# Altium PCB quadcopter_pcb.PcbDoc
Units mil, origin at the board's own origin, x right, y up, seen from the top; angles counter-clockwise.
Board outline 5909.63 x 5909.63 mil, 2 copper layers (Top Layer, Bottom Layer); 68 components, 47 nets, 252 pads, 72 vias.
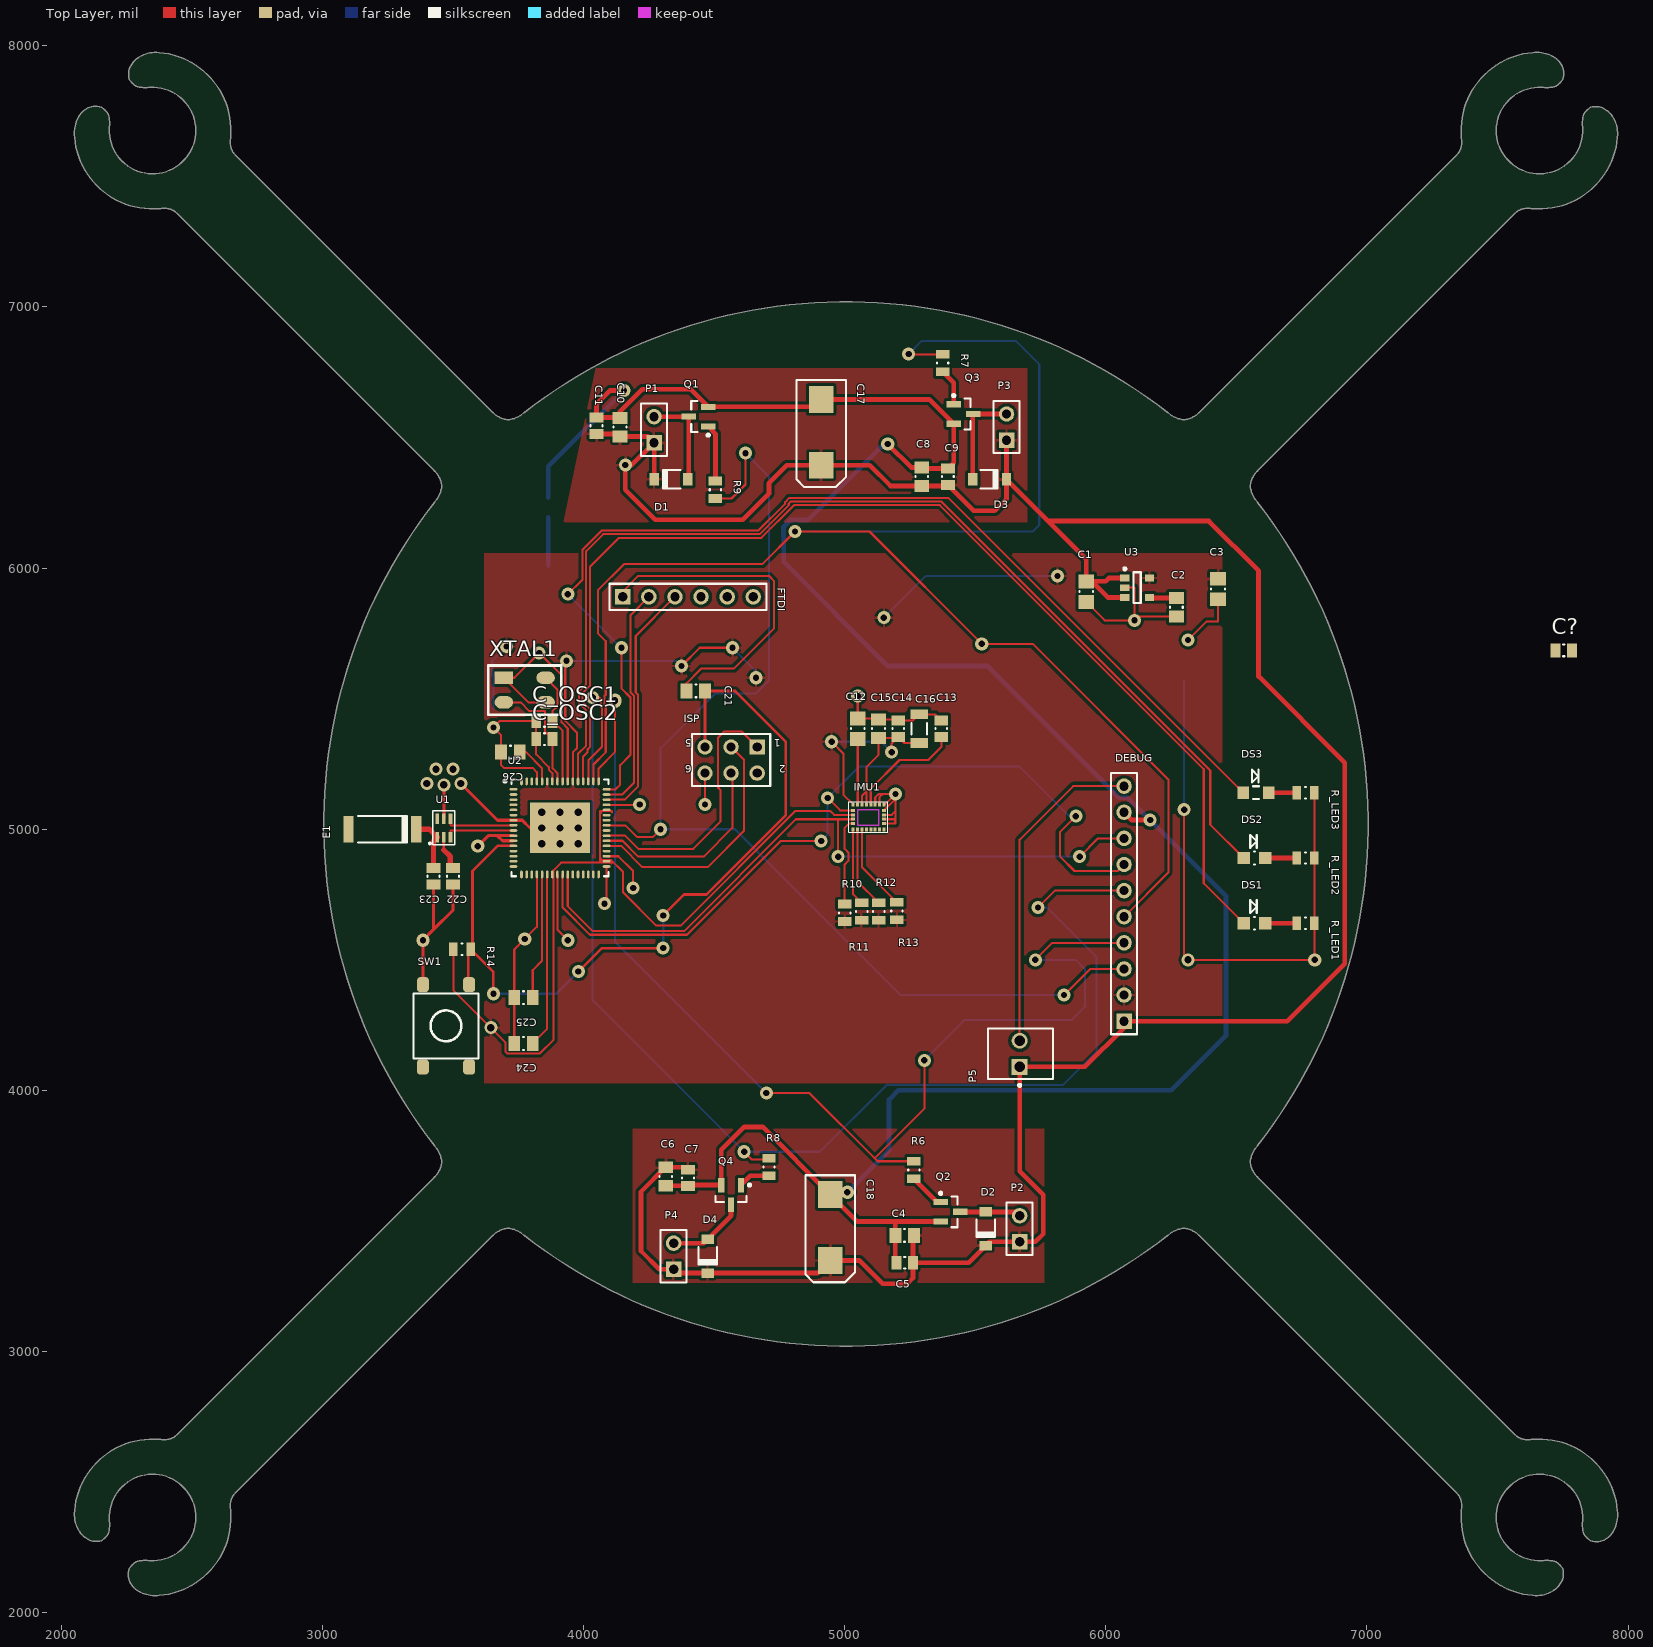
[diagram p0: Top Layer view]
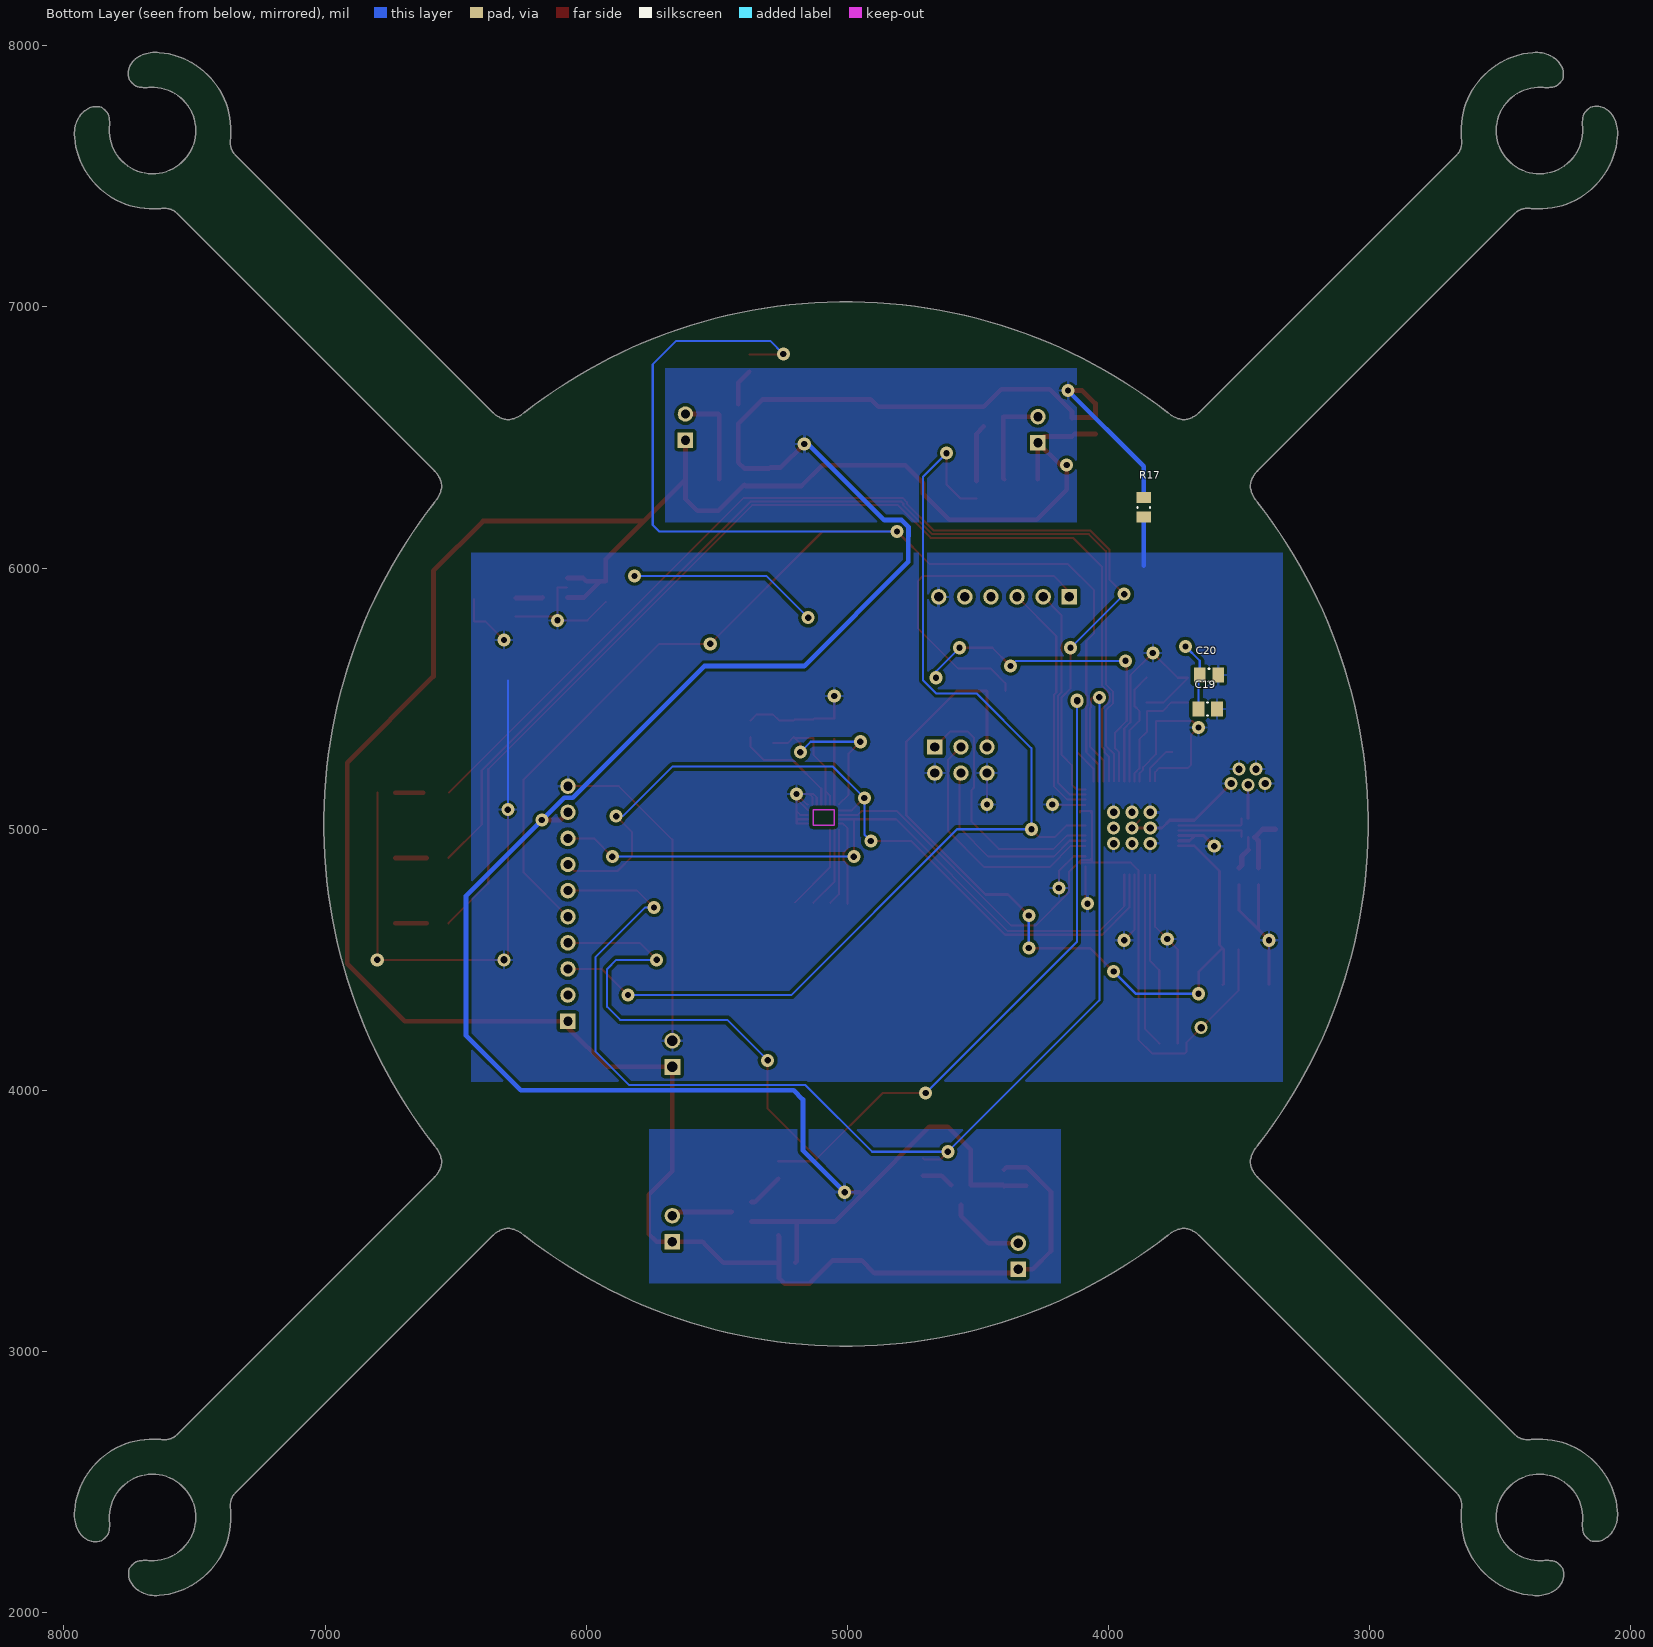
[diagram p1: Bottom Layer view, seen from below]

## Layer stack, top to bottom
Top Solder: solder mask 0.4, Solder Resist, Dk 3.5
Top Layer: signal copper 1.4
Dielectric 1: dielectric 12.6, FR-4, Dk 4.8
Bottom Layer: signal copper 1.4
Bottom Solder: solder mask 0.4, Solder Resist, Dk 3.5

## Board outline
801 vertices, not listed, extent 2050.25,2065.25 7959.88,7974.88

## Design rules (kind name [scope] priority, off if disabled: settings)
Clearance [All] p1: gap=6 ignorepadtopadclearanceinfootprint=FALSE except(10: Arc-Via Track-Via SMDPad-Via THPad-Via Via-Via; 12: Arc-Fill Arc-Poly Arc-Region Track-Fill Track-Poly Track-Region SMDPad-Fill SMDPad-Poly SMDPad-Region THPad-Fill THPad-Poly THPad-Region Via-Fill Via-Poly Via-Region Fill-Fill Fill-Poly Fill-Region Poly-Poly Poly-Region Region-Region)
DiffPairsRouting [All] p1: maxlimit=10 minlimit=10 mostfreqgap=10 toplayer_minwidth=8 toplayer_maxwidth=15 toplayer_prefwidth=15 bottomlayer_minwidth=8 bottomlayer_maxwidth=15 bottomlayer_prefwidth=15 maxuncoupledlength=500
PlaneClearance [All] p1: clearance=40
PlaneConnect [All] p1: planeconnectstyle=Relief reliefexpansion=20 reliefentries=4 reliefconductorwidth=10 reliefairgap=20
PolygonConnect [All] p1: connectstyle=Relief reliefconductorwidth=10 reliefentries=4 polygonreliefangle="90 Angle" airgapwidth=10
RoutingVias [All] p1: holewidth=24 width=50 viastyle="Through Hole" minholewidth=14 minwidth=24 maxholewidth=28 maxwidth=50
SMDNeckDown [All] p1: percent=75.000
SolderMaskExpansion [All] p1: expansion=4
Width Width_1 [InNetClass('power_Nets')] p1: maxlimit=20 minlimit=6 preferedwidth=18
Width [(InNetClass('imu_Nets') OR InNetClass('microcontroller_Nets'))] p2: maxlimit=20 minlimit=6 preferedwidth=8
27 further rules are at their usual default settings.

## Classes and differential pairs
net class microcontroller_Nets: GND LED1 LED2 LED3 M1_PWM M2_PWM M3_PWM M4_PWM MISO MOSI NetC21_2 NetC22_2 NetC23_1 NetC24_1 NetC25_1 NetC26_1 NetDS1_2 NetDS2_2 NetDS3_2 PGND RESET RF_N RF_P RX0 SCK SCL SDA TX0 V_BAT VCC XTAL1 XTAL2
net class imu_Nets: GND NetC12_1 NetC13_1 NetIMU1_5 NetIMU1_6 NetIMU1_7 NetIMU1_8 SCL SDA VCC
net class power_Nets: GND M1_PWM M2_PWM M3_PWM M4_PWM NetC2_2 NetD1_1 NetD2_1 NetD3_1 NetD4_1 NetQ1_1 NetQ2_1 NetQ3_1 NetQ4_1 PGND V_BAT VCC
component class power: C1 C2 C3 C4 C5 C6 C7 C8 C9 C10 C11 C17 C18 D1 D2 D3 D4 P1 P2 P3 P4 P5 Q1 Q2 Q3 Q4 R6 R7 R8 R9 R17 U3
component class microcontroller: C19 C20 C21 C22 C23 C24 C25 C26 C? C_OSC1 C_OSC2 DEBUG DS1 DS2 DS3 E1 FTDI ISP R14 R_LED1 R_LED2 R_LED3 SW1 U1 U2 XTAL1
component class imu: C12 C13 C14 C15 C16 IMU1 R10 R11 R12 R13
differential pair RF: +RF_P -RF_N

## Components (designator, comment, footprint, x,y, rotation, side; value= is the part's Value field where it differs from the comment)
C1 "CAP 1uF 25V 0805(2012)" CAPC0805(2012)100_M 5925,5910 r90 top value=1uF
C2 "CAP 100nF 100V 0805(2012)" CAPC0805(2012)145_N 6270,5850 r90 top value=100nF
C3 "CAP 1uF 25V 0805(2012)" CAPC0805(2012)100_M 6430,5920 r90 top value=1uF
C4 "CAP 100nF 100V 0805(2012)" CAPC0805(2012)145_N 5229.57,3445 r0 top value=100nF
C5 "CAP 4.7uF 10V 0805(2012)" CAPC0805(2012)155_L 5230,3340 r0 top value=4.7uF
C6 "CAP 100nF 100V 0805(2012)" CAPC0805(2012)145_N 4315,3670 r90 top value=100nF
C7 "CAP 4.7uF 10V 0805(2012)" CAPC0805(2012)155_L 4400,3665 r90 top value=4.7uF
C8 "CAP 100nF 100V 0805(2012)" CAPC0805(2012)145_N 5295,6350 r270 top value=100nF
C9 "CAP 4.7uF 10V 0805(2012)" CAPC0805(2012)155_L 5395,6350 r270 top value=4.7uF
C10 "CAP 100nF 100V 0805(2012)" CAPC0805(2012)145_N 4140,6539.57 r270 top value=100nF
C11 "CAP 4.7uF 10V 0805(2012)" CAPC0805(2012)155_L 4050,6545 r270 top value=4.7uF
C12 "CAP 100nF 16V 0805(2012)" CAPC0805(2012)145_M 5050,5385 r90 top value=100nF
C13 "CAP 10nF 25V 0805(2012)" CAPC0805(2012)100_L 5370,5385 r90 top value=10nF
C14 "CAP 10nF 25V 0805(2012)" CAPC0805(2012)100_L 5205,5385 r90 top value=10nF
C15 "CAP 220nF 10V 0805(2012)" CAPC0805(2012)75_N 5130,5385 r270 top value=220nF
C16 "CAP 10uF 10V 1206(3216)" CAPC1206(3216)130_L 5285,5385 r90 top value=10uF
C17 "TAJD227K010R" AVX-CAPC7343_V 4910,6520 r90 top
C18 "TAJD227K010R" AVX-CAPC7343_V 4945,3475 r90 top
C19 "CAP 1uF 10V 0805(2012)" CAPC0805(2012)145_N 3620,5460 r0 bottom value=1uF
C20 "CAP 1uF 10V 0805(2012)" CAPC0805(2012)145_N 3615,5590 r180 bottom value=1uF
C21 "CAP 100nF 100V 0805(2012)" CAPC0805(2012)145_N 4430,5530 r180 top value=100nF
C22 "CAP 22pF 16V 0805" CAPC0805(2012)100_L 3500,4820 r90 top value=22pF
C23 "CAP 0.75pF 100V 0805" CAPC0805(2012)100_L 3425,4820 r270 top value=0.75pF
C24 "CAP 1uF 0805" CAPC0805(2012)145_N 3770,4180 r180 top value=1uF
C25 "CAP 1uF 0805" CAPC0805(2012)145_N 3770,4355 r180 top value=1uF
C26 "CAP 1uF 0805" CAPC0805(2012)145_N 3720,5295 r180 top value=1uF
C? "CAP 12pF 16V 0805(2012)" CAPC0805(2012)100_L 7753.5,5685 r0 top value=12pF
C_OSC1 "CAP 12pF 16V 0805(2012)" CAPC0805(2012)100_L 3850,5415 r0 top value=12pF
C_OSC2 "CAP 12pF 16V 0805(2012)" CAPC0805(2012)100_L 3850,5345 r0 top value=12pF
D1 "1N4448W-TP" MCC-SOD123_V 4335,6340 r180 top
D2 "1N4448W-TP" MCC-SOD123_V 5540,3470 r270 top
D3 "1N4448W-TP" MCC-SOD123_V 5555,6340 r0 top
D4 "1N4448W-TP" MCC-SOD123_V 4475,3365 r270 top
DEBUG "Header 10" HDR1X10 6070,4265 r90 top
DS1 "LTST-C170GKT" LTST-C170GKT_V 6569.09,4640 r0 top
DS2 "LTST-C170CKT" LTST-C170CKT_V 6569.09,4890 r0 top
DS3 "LTST-C170YKT" LTST-C170YKT_V 6575,5140 r0 top
E1 "ANT-2.45-CHP-T" ANT-2.4-CHP 3230,5000 r180 top
FTDI "Header 6" HDR1X6 4150,5890 r0 top
IMU1 "iNEMO IMU" LGA-24 5150.79,5095 r180 top
ISP "Header 3X2" HDR2X3 4665,5315 r180 top
P1 "Header 2" HDR1X2 4270,6480 r90 top
P2 "Header 2" HDR1X2 5670,3420 r90 top
P3 "Header 2" HDR1X2 5620,6490 r90 top
P4 "Header 2" HDR1X2 4345,3315 r90 top
P5 "22-23-2021" MOLX-22-23-2021_V 5670,4140 r90 top
Q1 "SI2302DS,215" NXP-SOT23_N 4440,6580 r180 top
Q2 "SI2302DS,215" NXP-SOT23_N 5405,3535 r0 top
Q3 "SI2302DS,215" NXP-SOT23_N 5455,6590 r0 top
Q4 "SI2302DS,215" NXP-SOT23_N 4565,3600 r270 top
R6 "100R 1% 0805(2012)" RESC0805(2012)_L 5265,3695 r270 top value="100.00 Ohm"
R7 "100R 1% 0805(2012)" RESC0805(2012)_L 5375,6785 r270 top value="100.00 Ohm"
R8 "100R 1% 0805(2012)" RESC0805(2012)_L 4710,3706.54 r270 top value="100.00 Ohm"
R9 "100R 1% 0805(2012)" RESC0805(2012)_L 4505,6300 r90 top value="100.00 Ohm"
R10 "10K 5% 0805(2012)" RESC0805(2012)_L 5000,4680 r270 top value="10000.00 Ohm"
R11 "10K 5% 0805(2012)" RESC0805(2012)_L 5065,4685 r270 top value="10000.00 Ohm"
R12 "10K 5% 0805(2012)" RESC0805(2012)_L 5130,4685 r270 top value="10000.00 Ohm"
R13 "10K 5% 0805(2012)" RESC0805(2012)_L 5200,4686.54 r270 top value="10000.00 Ohm"
R14 "10K 5% 0805(2012)" RESC0805(2012)_L 3535,4540 r180 top value="10000.00 Ohm"
R17 "Jumper 0805(2012)" RESC0805(2012)_N 3865,6232.6 r90 bottom value="0.00 Ohm"
R_LED1 "330R 5% 0805(2012)" RESC0805(2012)_L 6765,4640 r0 top value="330.00 Ohm"
R_LED2 "330R 5% 0805(2012)" RESC0805(2012)_L 6765,4890 r0 top value="330.00 Ohm"
R_LED3 "330R 5% 0805(2012)" RESC0805(2012)_L 6765,5140 r0 top value="330.00 Ohm"
SW1 "DTSM-61NT/R" DIPT-DTSM-6_V 3473.19,4247.13 r90 top
U1 "748421245" WE-BAL_0805 3465,5005 r180 top
U2 "ATmega128RFA1-ZU" 64PI_N 3910,5005 r0 top
U3 "LP3985IM5X-3.0/NOPB" MF05A_L 6120,5925 r0 top
XTAL1 "crystal" crys 3695,5580 r0 top

## Footprints (in the part's own frame and the unit in brackets; to place one, negate y for a bottom-side part, rotate by r counter-clockwise, add the part's x,y. Pads: shape width x height; smd on the part's side, far side on the other; paste and mask are expansions set on the pad)
64PI_N [mm]
  oval 0.75x0.25 smd: 1(-4.525,3.75) 2(-4.525,3.25) 3(-4.525,2.75) 4(-4.525,2.25) 5(-4.525,1.75) 6(-4.525,1.25) 7(-4.525,0.75) 8(-4.525,0.25) 9(-4.525,-0.25) 10(-4.525,-0.75) 11(-4.525,-1.25) 12(-4.525,-1.75) 13(-4.525,-2.25) 14(-4.525,-2.75) 15(-4.525,-3.25) 16(-4.525,-3.75) 33(4.525,-3.75) 34(4.525,-3.25) 35(4.525,-2.75) 36(4.525,-2.25) 37(4.525,-1.75) 38(4.525,-1.25) 39(4.525,-0.75) 40(4.525,-0.25) 41(4.525,0.25) 42(4.525,0.75) 43(4.525,1.25) 44(4.525,1.75) 45(4.525,2.25) 46(4.525,2.75) 47(4.525,3.25) 48(4.525,3.75)
  oval 0.25x0.75 smd: 17(-3.75,-4.525) 18(-3.25,-4.525) 19(-2.75,-4.525) 20(-2.25,-4.525) 21(-1.75,-4.525) 22(-1.25,-4.525) 23(-0.75,-4.525) 24(-0.25,-4.525) 25(0.25,-4.525) 26(0.75,-4.525) 27(1.25,-4.525) 28(1.75,-4.525) 29(2.25,-4.525) 30(2.75,-4.525) 31(3.25,-4.525) 32(3.75,-4.525) 49(3.75,4.525) 50(3.25,4.525) 51(2.75,4.525) 52(2.25,4.525) 53(1.75,4.525) 54(1.25,4.525) 55(0.75,4.525) 56(0.25,4.525) 57(-0.25,4.525) 58(-0.75,4.525) 59(-1.25,4.525) 60(-1.75,4.525) 61(-2.25,4.525) 62(-2.75,4.525) 63(-3.25,4.525) 64(-3.75,4.525)
  rect 5.8x4.9 smd: 65(0,0)
  silkscreen extent -5.47,-4.7 4.7,4.7, body extent -4.55,-4.55 4.55,4.55, height 0.9
ANT-2.4-CHP [mil] "SM Antenna, 2-Lead, Body 6.5x2.2x1.0mm"
  rect 40x100 smd: 1(-130,0) 2(130,0)
  silkscreen extent -94,-51 94,51, body extent -130,-45 130,45, height 40
AVX-CAPC7343_V [mm] "SMT Capacitor, 2 Leads, Body 7.3x4.3mm"
  rect 2.6x2.4 smd: 1(-3.202,0.007) 2(3.198,0.007)
  silkscreen extent -5.33,-2.4 5.08,2.4, body extent -3.49,-2.03 3.51,2.04, height 2.9
CAPC0805(2012)75_N [mm] "Chip Capacitor, Body 2.0x1.2mm, Height 0.75mm, IPC Medium Density"
  rect 1.15x1.45 smd: 1(-0.9,0) 2(0.9,0)
  silkscreen extent -0.05,-0.62 0.05,0.62, body extent -1.1,-0.72 1.1,0.73, height 0.75
CAPC0805(2012)100_L [mm] "Chip Capacitor, Body 2.0x1.2mm, Height 1.0mm, IPC High Density"
  rect 0.95x1.35 smd: 1(-0.8,0) 2(0.8,0)
  silkscreen extent -0.05,-0.58 0.05,0.58, body extent -1.1,-0.72 1.1,0.72, height 1
CAPC0805(2012)100_M [mm] "Chip Capacitor, Body 2.0x1.2mm, Height 1.0mm, IPC Low Density"
  rect 1.35x1.55 smd: 1(-1,0) 2(1,0)
  silkscreen extent -0.05,-0.67 0.05,0.67, body extent -1.1,-0.72 1.1,0.72, height 1
CAPC0805(2012)145_M [mm] "Chip Capacitor, Body 2.0x1.2mm, Height 1.45mm, IPC Low Density"
  rect 1.35x1.55 smd: 1(-1,0) 2(1,0)
  silkscreen extent -0.05,-0.67 0.05,0.67, body extent -1.1,-0.72 1.1,0.72, height 1.45
CAPC0805(2012)145_N [mm] "Chip Capacitor, Body 2.0x1.2mm, Height 1.45mm, IPC Medium Density"
  rect 1.15x1.45 smd: 1(-0.9,0) 2(0.9,0)
  silkscreen extent -0.05,-0.62 0.05,0.62, body extent -1.1,-0.72 1.1,0.73, height 1.45
CAPC0805(2012)155_L [mm] "Chip Capacitor, Body 2.0x1.2mm, Height 1.55mm, IPC High Density"
  rect 0.95x1.35 smd: 1(-0.8,0) 2(0.8,0)
  silkscreen extent -0.05,-0.58 0.05,0.58, body extent -1.1,-0.72 1.1,0.72, height 1.55
CAPC1206(3216)130_L [mm] "Chip Capacitor, Body 3.2x1.6mm, Height 1.3mm, IPC High Density"
  rect 0.95x1.7 smd: 1(-1.4,0) 2(1.4,0)
  silkscreen extent -0.55,-0.75 0.55,0.75, body extent -1.7,-0.9 1.7,0.9, height 1.3
crys [mil]
  oval 71x47 smd: 1(0,-94) 2(160,-94) 3(160,0)
  rect 71x47 smd: 4(0,0)
  silkscreen extent -60,-141 220,47
DIPT-DTSM-6_V [mil] "Switch, Through-Hole, 4 Leads, Body 8.5x8.5mm, Row Spacing 9.0mm, Pitch 4.5mm"
  rrect50% 57x45 smd: 1(157.87,-88.58) 2(-157.48,-88.58) 3(157.87,88.19) 4(-157.48,88.19)
  silkscreen extent -124,-124 124,124, body extent -177,-122 177,122, height 177
HDR1X2 [mm] "Connector; Header; 2 Position"
  rect 1.5x1.5 hole 0.9: 1(0,0)
  round 1.5 hole 0.9: 2(2.54,0)
  silkscreen extent -1.27,-1.27 3.81,1.27
HDR1X6 [mm] "Connector; Header; 6 Position"
  rect 1.5x1.5 hole 0.9: 1(0,0)
  round 1.5 hole 0.9: 2(2.54,0) 3(5.08,0) 4(7.62,0) 5(10.16,0) 6(12.7,0)
  silkscreen extent -1.27,-1.27 13.97,1.27
HDR1X10 [mm] "Connector; Header; 10 Position"
  rect 1.5x1.5 hole 0.9: 1(0,0)
  round 1.5 hole 0.9: 2(2.54,0) 3(5.08,0) 4(7.62,0) 5(10.16,0) 6(12.7,0) 7(15.24,0) 8(17.78,0) 9(20.32,0) 10(22.86,0)
  silkscreen extent -1.27,-1.27 24.13,1.27
HDR2X3 [mm] "Connector; Header; 3x2 Position"
  rect 1.5x1.5 hole 0.9: 1(0,0)
  round 1.5 hole 0.9: 2(0,2.54) 3(2.54,0) 4(2.54,2.54) 5(5.08,0) 6(5.08,2.54)
  silkscreen extent -1.27,-1.27 6.35,3.81
LGA-24 [mm]
  rect 0.29x0.4 smd paste-25.4 mask-25.4: 1(3.01,0) 6(3.01,2.45) 7(2.58,2.45) 8(2.15,2.45) 9(1.72,2.45) 10(1.29,2.45) 11(0.86,2.45) 12(0.43,2.45) 13(0,2.45) 18(0,0) 19(0.43,0) 20(0.86,0) 21(1.29,0) 22(1.72,0) 23(2.15,0) 24(2.58,0)
  rect 0.4x0.29 smd paste-25.4 mask-25.4: 2(3.01,0.58) 3(3.01,1.01) 4(3.01,1.44) 5(3.01,1.87) 14(0,1.87) 15(0,1.44) 16(0,1.01) 17(0,0.58)
  Keep-Out Layer lines w0.127: 2.54,2.032 0.508,2.032 0.508,0.508 2.54,0.508 2.54,2.032
  silkscreen extent -0.38,-0.27 3.43,2.73
LTST-C170CKT_V [mm] "SMD, 2-Leads, Body 2x1.25mm"
  rect 1.2x1.2 smd: 1(-1.05,0) 2(1.05,0)
  silkscreen extent -0.41,-0.62 0.23,2.25, body extent -1,-0.63 1,0.63, height 1.1
LTST-C170GKT_V [mm] "SMD, 2-Leads, Body 2x1.25mm"
  rect 1.2x1.2 smd: 1(-1.05,0) 2(1.05,0)
  silkscreen extent -0.41,-0.62 0.23,2.25, body extent -1,-0.63 1,0.63, height 1.1
LTST-C170YKT_V [mm] "SMD, 2-Leads, Body 2x1.25mm"
  rect 1.1x1.25 smd: 1(-1.25,0) 2(1.25,0)
  silkscreen extent -0.41,-0.62 0.3,2.25, body extent -1,-0.63 1,0.63, height 1.1
MCC-SOD123_V [mil] "SOD123, 2-Leads, Body 2.7x1.6mm, Height 1.35mm"
  rect 35.98x47.99 smd: 1(-64.5,0) 2(64.5,0)
  silkscreen extent -36,-35 31,35, body extent -53,-31 53,31, height 53
MF05A_L [mm] "SOT23, 5-Leads, Body 2.9x1.6mm, Pitch 0.95mm, Lead Span 2.8mm, IPC High Density"
  rect 0.9x0.65 smd: 1(-1.2,0.95) 2(-1.2,0) 3(-1.2,-0.95) 4(1.2,-0.95) 5(1.2,0.95)
  silkscreen extent -1.32,-1.5 0.35,1.95, body extent -0.83,-1.49 0.83,1.5, height 1.19
MOLX-22-23-2021_V [mm] "THD, 2-Leads, Body 6.35x4.93mm, Pitch 2.54mm"
  rect 1.55x1.55 hole 1.02: 1(-1.27,0)
  round 1.55 hole 1.02: 2(1.27,0)
  silkscreen extent -3.19,-3.25 2.47,3.1, body extent -2.46,-3.25 2.46,3.1, height 10.66
NXP-SOT23_N [mm] "SOT23, 3-Leads, Body 3x1.4mm, Pitch 0.95mm, IPC Medium Density"
  rect 1.4x0.6 smd: 1(-0.95,0.95) 2(-0.95,-0.95) 3(0.95,0)
  silkscreen extent -1.08,-1.5 0.7,1.92, body extent -0.7,-1.5 0.7,1.5, height 1.1
RESC0805(2012)_L [mm] "Chip Resistor, Body 2.0x1.3mm, IPC High Density"
  rect 0.85x1.3 smd: 1(-0.85,0) 2(0.85,0)
  silkscreen extent -0.05,-0.55 0.05,0.55, body extent -1.1,-0.67 1.1,0.68, height 0.7
RESC0805(2012)_N [mm] "Chip Resistor, Body 2.0x1.3mm, IPC Medium Density"
  rect 1.05x1.4 smd: 1(-0.95,0) 2(0.95,0)
  silkscreen extent -0.05,-0.6 0.05,0.6, body extent -1.1,-0.67 1.1,0.68, height 0.7
WE-BAL_0805 [mm]
  rect 0.35x1 smd: 1(0.65,0.9) 2(0,0.9) 3(-0.65,0.9) 4(-0.65,-0.9) 5(0,-0.9) 6(0.65,-0.9)
  silkscreen extent -1.07,-1.65 1.39,1.65, body extent -1,-0.63 1,0.62, height 0.86

## Part data
C1 C3: library part CMP-1036-04754-1, "CAP 1uF 25V ±10% 0805 (2012 Metric) Thickness 1mm SMD", Case-EIA=0805, Case-Metric=2012, Rated Voltage="25 V", Tolerance=±10%, Max Thickness="1 mm", Technology=SMT
C2 C4 C6 C8 C10 C21: library part CMP-1036-04431-1, "CAP 100nF 100V ±20% 0805 (2012 Metric) Thickness 1.45mm SMD", Case-EIA=0805, Case-Metric=2012, Rated Voltage="100 V", Tolerance=±20%, Max Thickness="1.45 mm", Technology=SMT
C5 C7 C9 C11: library part CMP-1036-04882-1, "CAP 4.7uF 10V ±10% 0805 (2012 Metric) Thickness 1.55mm SMD", Case-EIA=0805, Case-Metric=2012, Rated Voltage="10 V", Tolerance=±10%, Max Thickness="1.55 mm", Technology=SMT
C12: library part CMP-1036-04404-1, "CAP 100nF 16V ±20% 0805 (2012 Metric) Thickness 1.45mm SMD", Case-EIA=0805, Case-Metric=2012, Rated Voltage="16 V", Tolerance=±20%, Max Thickness="1.45 mm", Technology=SMT
C13 C14: library part CMP-1036-03826-1, "CAP 10nF 25V ±2% 0805 (2012 Metric) Thickness 1mm SMD", Case-EIA=0805, Case-Metric=2012, Rated Voltage="25 V", Tolerance=±2%, Max Thickness="1 mm", Technology=SMT
C15: library part CMP-1036-04526-1, "CAP 220nF 10V ±20% 0805 (2012 Metric) Thickness 0.75mm SMD", Case-EIA=0805, Case-Metric=2012, Rated Voltage="10 V", Tolerance=±20%, Max Thickness="0.75 mm", Technology=SMT
C16: library part CMP-1037-04970-1, "CAP 10uF 10V -20% to +80% 1206 (3216 Metric) Thickness 1.3mm SMD", Case-EIA=1206, Case-Metric=3216, Rated Voltage="10 V", Tolerance="-20% to +80%", Max Thickness="1.3 mm", Technology=SMT
C17 C18: library part CMP-0279-00002-2, "Capacitor, Tantalum, 220uF 10% 10V MCCT-D (7343-31)", Capacitance=220uF, Manufacturer=AVX, Rated Voltage=10V, Tolerance=10%, ComponentLink1Description="Manufacturer URL", ComponentLink1URL=http://www.avx.com/, ComponentLink2Description=Datasheet, ComponentLink2URL=http://www.avx.com/docs/Catalogs/taj.pdf, DatasheetVersion=Jul-13, Mounting Technology="Surface Mount", PackageDescription="2-Pin SMT Capacitor, 7.3 x 4.3 mm Body", PackageReference=CAPC7343, PartNumber=TAJD227K010R, Polarity=Polarized, Technology=Tantalum
C19 C20 C24 C25 C26: library part CMP-1036-04738-1, "CAP 1uF 10V ±10% 0805 (2012 Metric) Thickness 1.45mm SMD", Case-EIA=0805, Case-Metric=2012, Rated Voltage="10 V", Tolerance=±10%, Max Thickness="1.45 mm", Technology=SMT
C22: library part CMP-1036-01214-1, "CAP 22pF 16V ±0.25pF 0805 (2012 Metric) Thickness 1mm SMD", Case-EIA=0805, Case-Metric=2012, Rated Voltage="16 V", Tolerance=±0.25pF, Max Thickness="1 mm", Technology=SMT
C23: library part CMP-1036-00042-1, "CAP 0.75pF 100V ±0.5pF 0805 (2012 Metric) Thickness 1mm SMD", Case-EIA=0805, Case-Metric=2012, Rated Voltage="100 V", Tolerance=±0.5pF, Max Thickness="1 mm", Technology=SMT
C? C_OSC1 C_OSC2: library part CMP-1036-00926-1, "CAP 12pF 16V ±0.5pF 0805 (2012 Metric) Thickness 1mm SMD", Case-EIA=0805, Case-Metric=2012, Rated Voltage="16 V", Tolerance=±0.5pF, Max Thickness="1 mm", Technology=SMT
D1 D2 D3 D4: library part CMP-0862-00001-1, "Switching Diode, 500 mW, 100 V, -55 to 150 degC, SOD123, RoHS, Tape and Reel", Manufacturer="Micro Commercial Components", Operating Temperature Range="-55 to 150 degC", Typical Junction Capacitance="4 pF", ComponentLink1Description="Manufacturer URL", ComponentLink1URL=http://www.mccsemi.com/, ComponentLink2Description=Datasheet, ComponentLink2URL=http://www.mccsemi.com/up_pdf/1N4448W(SOD-123).pdf, ComponentLink3Description="Package Specification", ComponentLink3URL=http://www.mccsemi.com/up_pdf/1N4448W(SOD-123).pdf, DatasheetVersion="Rev. C", FV="1 V Max.", IF (AV)="250 mA", IR="25 nA", Mounting Technology="Surface Mount", PackageDescription="2-Pin SOD123, Body 2.7 x 1.6 mm, Height 1.35 mm", PackageReference=SOD123, PackageVersion="Rev. C", Packing="Tape and Reel", PartNumber=1N4448W-TP, PD="500 mW", RoHS=TRUE, Trr="4 nS", VRM (PRV)="100 V"
DEBUG: "Header, 10-Pin", LatestRevisionDate=17-Jul-2002, LatestRevisionNote="Re-released for DXP Platform.", Publisher="Altium Limited"
DS1: library part CMP-1674-00002-5, "LED Uni-Color Green, 100 mW, 120 mA, -55 to 85 degC, 2-Pin SMD, RoHS, Tape and Reel", Colour=Green, Manufacturer=Lite-On, Max Operating Temperature="85 degC", Min Operating Temperature="-55 degC", Package Quantity=1, ComponentLink1Description="Manufacturer URL", ComponentLink1URL=http://www.us.liteon.com/, ComponentLink2Description=Datasheet, ComponentLink2URL=http://media.digikey.com/pdf/Data%20Sheets/Lite-On%20PDFs/LTST-C170GKT.pdf, DatasheetVersion=03/2003, Height="1.1 mm", Length="2 mm", Mount="Surface Mount", Mounting Technology="Surface Mount", PackageDescription="2-Pin Surface Mount Device, Body 2 x 1.25 mm", PackageReference=C170GKT, Packaging="Tape and Reel", Pins=2, RoHSCompliant=true
DS2: library part CMP-1674-00001-5, "LED Uni-Color Red, 100 mW, 200 mA, -55 to 85 degC, 2-Pin SMD, RoHS, Tape and Reel", Colour=Red, Manufacturer=Lite-On, Max Operating Temperature="85 degC", Min Operating Temperature="-55 degC", Package Quantity=3000, ComponentLink1Description="Manufacturer URL", ComponentLink1URL=http://www.us.liteon.com/, ComponentLink2Description=Datasheet, ComponentLink2URL=http://media.digikey.com/pdf/Data%20Sheets/Lite-On%20PDFs/LTST-C170CKT.pdf, DatasheetVersion=03/2003, Height="1.1 mm", Length="2 mm", Mount="Surface Mount", Mounting Technology="Surface Mount", PackageDescription="2-Pin Surface Mount Device, Body 2 x 1.25 mm", PackageReference=C170CKT, Packaging="Tape and Reel", Pins=2, RoHSCompliant=true
DS3: library part CMP-1674-00003-5, "LED Uni-Color Yellow, 60 mW, 80 mA, -55 to 85 degC, 2-Pin SMD, RoHS, Tape and Reel", Colour=Yellow, Manufacturer=Lite-On, Max Operating Temperature="85 degC", Min Operating Temperature="-55 degC", Package Quantity=3000, ComponentLink1Description="Manufacturer URL", ComponentLink1URL=http://www.us.liteon.com/, ComponentLink2Description=Datasheet, ComponentLink2URL="http://media.digikey.com/pdf/Data Sheets/Lite-On PDFs/LTST-C170YKT.pdf", DatasheetVersion=03/2000, Height="1.1 mm", Length="2 mm", Mount="Surface Mount", Mounting Technology="Surface Mount", PackageDescription="2-Pin Surface Mount Device, Body 2 x 1.25 mm", PackageReference=C170YKT, Packaging="Tape and Reel", Pins=2, RoHSCompliant=true
E1: library part CMP-0172-00025-1, "1/4-wave Monopole Ultra-Compact Chip Antenna, CHP Series, 2.4GHz, Tape and Reel", DatasheetVersion=Jan-2009, Note1="No ground planes or traces under the antenna", Note2="Pin 1 is feed terminal, Pin 2 is for physical support only.", PackageDescription="SMD Ceramic Antenna, CHP Series, 2.45MHz, 2-Leads, 6.5 x 2.2 x 1.0 mm Body", PackageReference=ANT-2.4-CHP, PackageVersion=Jan-2009, PCB_Layout="Complies with manufacturer's recommendation."
FTDI: "Header, 6-Pin", LatestRevisionDate=17-Jul-2002, LatestRevisionNote="Re-released for DXP Platform.", Publisher="Altium Limited"
IMU1: library part LSM9DS1, Supplier Part Number 1=497-14946-1-ND, Supplier 1=Digikey
ISP: "Header, 3-Pin, Dual row", LatestRevisionDate=17-Jul-2002, LatestRevisionNote="Re-released for DXP Platform.", Publisher="Altium Limited"
P1 P2 P3 P4: "Header, 2-Pin", LatestRevisionDate=17-Jul-2002, LatestRevisionNote="Re-released for DXP Platform.", Publisher="Altium Limited"
P5: library part CMP-1704-00001-3, "Male Header, Pitch 2.54 mm, 1 x 2 Position, Height 10.67 mm, Tail Length 3.56 mm, 0 to 75 degC, RoHS, Bulk", Max Operating Temperature="75 degC", Min Operating Temperature="0 degC", Package Quantity=3000, ComponentLink1Description="Manufacturer URL", ComponentLink1URL=http://www.molex.com/, ComponentLink2Description=Datasheet, ComponentLink2URL=https://datasheet.ciiva.com/19454/232266-19454304.pdf, Height="10.67 mm", Length="5.08 mm", Mount="Through Hole", Mounting Technology="Through Hole", PackageDescription="Male Header, Pitch 2.54 mm, 1 x 2 Position, Height 10.67 mm, Tail Length 3.56 mm", Packaging=Bulk, PartNumber=22-23-2021, Pins=2, Radiation Hardening=No, REACH SVHC=Unknown, RoHSCompliant=True, Width="6.35 mm"
Q1 Q2 Q3 Q4: library part CMP-1258-00133-1, "N-Channel Enhancement Mode Field-Effect Transistor, 20 V, 2.5 A, 3-Pin SOT23, Tape and Reel", Manufacturer="NXP Semiconductors", Channel Type=N, Ciss [typ] (pF)=230, Code_JEDEC=TO-236AB, ComponentLink1Description="Manufacturer URL", ComponentLink1URL=http://www.nxp.com/, ComponentLink2Description=Datasheet, ComponentLink2URL=http://www.nxp.com/documents/data_sheet/SI2302DS.pdf, ComponentLink3Description="Package Specification", ComponentLink3URL=http://www.nxp.com/documents/outline_drawing/sot023_po.pdf, Coss [typ] (pF)=125, DatasheetVersion="Rev. 02", ID [max] (A)=2.5, Mounting Technology="Surface Mount", PackageDescription="3-Pin Small Outline Transistor Package, Body 2.9 x 1.3 mm, Pitch 0.95 mm", PackageReference=SOT23, PackageVersion="06-03-16, 03/2006", Packing="Tape & Reel", PartNumber=SI2302DS,215, VDS [max] (V)=20
R6 R7 R8 R9: library part CMP-1013-00397-1, "100R 0.125W 1% 0805 (2012 Metric)  SMD", Case-EIA=0805, Case-Metric=2012, Power="0.125 W", Tolerance="1 %", Technology=SMT
R10 R11 R12 R13 R14: library part CMP-1013-00098-1, "10K 0.125W 5% 0805 (2012 Metric)  SMD", Case-EIA=0805, Case-Metric=2012, Power="0.125 W", Tolerance="5 %", Technology=SMT
R17: library part CMP-1013-00001-1, "Jumper 0805 (2012 Metric)", Case-EIA=0805, Case-Metric=2012, Power=None, Technology=SMT, Tolerance=None
R_LED1 R_LED2 R_LED3: library part CMP-1013-00062-1, "330R 0.125W 5% 0805 (2012 Metric)  SMD", Case-EIA=0805, Case-Metric=2012, Power="0.125 W", Tolerance="5 %", Technology=SMT
SW1: library part CMP-0306-00001-1, "Switch, SPNO Push Button SMD", Manufacturer=Diptronics, ComponentLink1Description="Manufacturer URL", ComponentLink1URL=http://www.dip.com.tw/, ComponentLink2Description=Datasheet, ComponentLink2URL=http://www.dip.com.tw/Products_tact.htm, ComponentLink3Description="Package Specification", ComponentLink3URL=http://www.dip.com.tw/PDF/pro_tact/DTSM_G_-6_2_-V.pdf, Mechanical Life="200,000 cycles", Mounting Technology="Through Hole", PackageDescription="Switch, Through-Hole, 4 Leads, Body 8.5x8.5mm, Row Spacing 9.0mm, Pitch 4.5mm", PackageReference=DTSM-6, Packing Type=Tape&Reel, PartNumber=DTSM-61NT/R
U1: "WE-BAL Multilayer Chip Balun, size 0805", Frequence=2400-2500MHz, Supplier Part Number 1=712-1065-6-ND, BalancedImpedance=100O, ComponentLink1Description=Manufacturer, ComponentLink1URL=http://www.we-online.de, ComponentLink2Description=Datasheet, ComponentLink2URL=http://katalog.we-online.de/pbs/datasheet/748421245.pdf, PartNumber=748421245, PublishedDate="Aug 2016", Publisher="Wurth Elektronik", Size=0805, Supplier 1=Digikey
U2: library part CMP-0107-00010-2, "8-bit AVR Microcontroller with Low Power 2.4GHz Transceiver for ZigBee and IEEE 802.15.4, 64-Pin VQFN (Sawn) (PI64), Industrial (-40°C to 85°C)", Frequency Band="2.4 GHz", Max. Operating Frequency="16 MHz", Operating Voltage (Vcc)="1.8 to 3.6", Power Output (dBm)=3.5, Receive Current Consumption (mA)=16.6, Supplier Part Number 1=ATMEGA128RFA1-ZFRCT-ND, Transmit Current Consumption (mA)=18.6, ADC channels=8, ADC Resolution (bits)=10, Analog Comparators=1, Antenna Diversity=Yes, ComponentLink1Description="Manufacturer URL", ComponentLink1URL=http://www.atmel.com/, ComponentLink2Description=Datasheet, ComponentLink2URL=http://www.atmel.com/Images/doc8266.pdf, Crypto Engine=AES, DatasheetVersion="rev C, Oct-2011", EEPROM (Bytes)=4096, External PA Control=Yes, Flash (Kbytes)="128 Kbytes", Link Budget (dBm)=103.5, Max Data Rate (Mb/s)=2, Max I/O Pins=38, PackageDescription="64-Pin Quad Flat No-Lead (QFN), 9 x 9 mm Body, 0.5 mm Pitch, 5.65 x 4.75 mm Exposed Pad", PackageReference=64PI, PackageVersion="revA, Feb-2008", PartId=1, Receiver Sensitivity (dBm)=-100, RevisionNote="Updated to Oct-2011 datasheet, symbol revised, parameters added", SPI=1, SRAM (Kbytes)=16, Supplier 1=Digikey, Timers=6, TWI (I2C)=1, UART=1
U3: library part CMP-0062-01849-2, "Micropower, 150mA Low-Noise Ultra Low-Dropout CMOS Voltage Regulator, 5-pin SOT-23, Pb-Free", Manufacturer="National Semiconductor", PackageTopMarking=LCRB*XTT, PowerWise=N, ComponentLink1Description="LP3985 Datasheet", ComponentLink1URL=http://www.national.com/ds/LP/LP3985.pdf, ComponentLink2Description="LP3985 Web Page", ComponentLink2URL=http://www.national.com/pf/LP/LP3985.html, ComponentLink3Description="MF05A Package Page", ComponentLink3URL=http://www.national.com/packaging/folders/mf05a.html, CompType="LDO IC", DatasheetVersion=Aug-2005, PackageDescription="Molded SOT-23, .115 x .063 x .040 in Body, 5 Lead, .0375 in Pitch", PackageReference=MF05A, PackageVersion="revD, Aug-2008", PinCount=5, RevisionNote="Component URLs added", RoHS=Y

## Via types
v1: diameter 50, hole 24, Top Layer to Bottom Layer, 56 vias
v2: diameter 50, hole 28, Top Layer to Bottom Layer, 16 vias

## Nets (pads, with @x,y where several pads share a name; then routed paths per layer and width w, separated by ;. In a path a pad name is that pad's centre, name@x,y a point inside that pad or via, vN(x,y) a via of type N, cw(c..) or ccw(c..) an arc to the next point about the centre after c; other vN are vias at no path point)
GND: C1.1 C2.1 C3.1 C12.2 C13.2 C14.2 C15.1 C16.2 C19.1 C20.2 C22.1 C23.2 C24.2 C25.2 C26.2 C_OSC1.1 C_OSC2.1 DEBUG.10 FTDI.6 IMU1.14 IMU1.15 IMU1.16 IMU1.17 IMU1.18 IMU1.19 IMU1.20 ISP.2 ISP.6 P5.2 R17.1 R_LED1.2 R_LED2.2 R_LED3.2 SW1.3 U1.5 U2.7 U2.10 U2.11 U2.20 U2.24 U2.33 U2.35 U2.45 U2.55 U2.58 U2.61 U2.65 U3.2 XTAL1.2 XTAL1.4 | length 10041.4
  Top Layer w8: C24.2 C25.2 3734.57,4539.57 v1(3775,4580) 3821.42,4626.42 U2.20 ; U2.61 3821.42,5218.58 3805,5235 3695,5235 3684.57,5245.43 C26.2 3684.57,5360.43 v1(3655,5390) 3680,5415 C_OSC1.1 C_OSC2.1 3818.5,5286.5 3867.5,5237.5 3867.5,5227.7 3880.47,5214.73 U2.58 ; XTAL1.2 3789,5486 XTAL1.4 3735,5580 v1(3830,5675) 3916,5589 3916,5409.2 3939.53,5385.67 U2.55 ; U2.65@3880.47,5034.53 v2(3910,5005) ; U2.24 3900.16,4614.84 v1(3940,4575) ; v1(4080,4715) 4086.85,4721.85 4088.15,4721.85 U2.33 ; U2.35 4133.27,4896.73 4190,4840 v1(4190,4775) ; U2.45 4213.58,5093.58 v1(4215,5095) ; v1(4465,5095) ISP.6 ; v1(5050,5510) C12.2 5126.06,5424.37 C15.1 5201.06,5420.43 C14.2 5261.38,5416.5 C16.2 5346.38,5440.12 C13.2 ; IMU1.20 5116.93,5121.93 5130,5135 5145,5135 ; IMU1.19 5133.86,5123.86 5145,5135 ; IMU1.14 5193.62,5021.38 5193.62,5040.24 ; IMU1.15 5191.69,5038.31 5193.62,5040.24 ; IMU1.16 5180.24,5055.24 5195,5070 ; IMU1.17 v1@5195,5116.38 ; IMU1.18 5155,5095 v1(5195,5135) ; P5.2 5670,4960 5875,5165 DEBUG.10 ; C1.1 5995.63,5800 v1(6110,5800) ; U3.2 6110,5925 v1(6110,5800) ; C2.1 6124.57,5814.57 v1(6110,5800) ; v1(6300,5075) 6300,4515 v2(6315,4500) 6796.93,4500 6798.46,4501.54 R_LED1.2 R_LED2.2 R_LED3.2 ; v1(6315,5725) 6385,5795 6430,5795 C3.1 ; 5145,5135 v1(5195,5135) ; 5193.62,5040.24 5195,5041.62 5195,5070 ; 5195,5070 v1@5195,5116.38 ; v1@5195,5116.38 v1(5195,5135)
  Top Layer w12: SW1.3 v1(3385,4575) 3425,4615 ; C23.2 3425,4615 ; U1.5 v2(3465,5170) v2@3465,5175 ; C22.1 3500,4690 3425,4615 ; v2(3530,5175) 3670.47,5034.53 U2.7 3765.47,5034.53 3795,5005 v2(3840,5005) v2(3910,5005) ; v1(3595,4935) 3635.47,4975.47 3670,4975.47 ; U2.11 3689.68,4955.79 3670,4975.47 ; U2.10 3670,4975.47
  Bottom Layer w8: v1(6300,5075) 6300,5570
  Bottom Layer w18: 3865,6010 R17.1
  other v1: 6800,4500 3980,5065
  other v2: 3840,4945 3910,4945 3980,4945 3980,5005 3840,5065 3910,5065 3980,5065 3400,5175 3435,5230 3500,5230
LED1: DS1.1 U2.52 | length 4375.9
  Top Layer w8: U2.52 3998.58,5278.58 4015,5295 4015,5305.2 4024,5314.2 4024,5460.85 3996,5488.85 3996,5521.15 4024,5549.15 4024,6004 4136,6116 4680.8,6116 4805.8,6241 5364.2,6241 6375,5230.2 6375,4792.76 DS1.1
LED2: DS2.1 U2.53 | length 4204.6
  Top Layer w8: U2.53 3978.9,5288.9 4010,5320 4010,5455.05 3982,5483.05 3982,5526.95 4010,5554.95 4010,6065 4075,6130 4675,6130 4786,6241 4786,6246.8 4794.2,6255 5370,6255 6400,5225 6400,5017.76 DS2.1
LED3: DS3.1 U2.48 | length 4181.9
  Top Layer w8: v1(3940,5900) 3996,5956 3996,6070.8 4069.2,6144 4669.2,6144 4772,6246.8 4772,6252.6 4788.4,6269 5396.79,6269 DS3.1 ; U2.48 4122.64,5152.64 4140,5170 4140,5245 4180,5285 4180,5504.5 4145,5539.5 v1(4145,5695)
  Bottom Layer w8: v1(3940,5900) v1(4145,5695)
M1_PWM: DEBUG.3 R9.1 U2.41 | length 4314.4
  Top Layer w8: U2.41 4160.16,5014.84 4205,4970 4265,4970 v1(4295,5000) ; R9.1 4566.54,6266.54 4620,6320 v1(4620,6440) ; v1(5840,4365) 5940,4465 DEBUG.3
  Bottom Layer w8: v1(4620,6440) 4710,6350 4710,5570 4660,5520 4505,5520 4295,5310 v1(4295,5000) 4580,5000 5215,4365 v1(5840,4365)
M2_PWM: DEBUG.4 R6.1 U2.49 | length 4626.3
  Top Layer w8: U2.49 4057.64,5232.64 4120,5295 v1(4120,5490) v1(4120,5495) ; v1(4700,3990) 4865,3990 5115,3740 ; R6.1 5126.54,3728.46 5115,3740 ; v1(5305,4115) 5305,3930 5115,3740 ; v1(5730,4500) 5795,4565 DEBUG.4
  Bottom Layer w8: v1(4120,5495) v1(4120,5490) 4120,4570 v1(4700,3990) ; v1(5305,4115) 5460,4270 5870,4270 5920,4320 5920,4465 5885,4500 v1(5730,4500)
M3_PWM: DEBUG.5 R7.1 U2.50 | length 6286.2
  Top Layer w8: U2.50 4037.95,5247.95 4085,5295 4085,5469.85 4081,5473.85 4081,5511.15 4085,5515.15 4085,5720 4055,5750 4055,5915 4155,6015 4685,6015 v1(4810,6140) 5095,6140 v1(5525,5710) 5720,5710 6240,5190 6240,4835 DEBUG.5 ; v1(5245,6820) 5243.47,6818.47 R7.1
  Bottom Layer w8: v1(4810,6140) 5720,6140 5745,6165 5745,6780 5655,6870 5295,6870 v1(5245,6820)
M4_PWM: DEBUG.6 R8.1 U2.51 | length 4992.3
  Top Layer w8: U2.51 4018.27,5263.27 4070,5315 4070,5465.05 4067,5468.05 4067,5498 4060,5505 v1(4035,5505) ; v1(4615,3765) 4645,3735 4705,3735 R8.1 ; v1(5740,4700) 5805,4765 DEBUG.6
  Bottom Layer w8: v1(4035,5505) 4035,4345 v1(4615,3765) 4905,3765 5160,4020 5835,4020 5965,4150 5965,4510 5775,4700 v1(5740,4700)
MISO: ISP.1 U2.39 | length 1010.6
  Top Layer w8: U2.39 4159.53,4975.47 4210,4925 4420,4925 4525,5030 4525,5150 4515,5160 4515,5350 4540,5375 4605,5375 ISP.1
MOSI: ISP.4 U2.38 | length 764.7
  Top Layer w8: U2.38 4149.21,4955.79 4210,4895 4460,4895 4570,5005 4570,5210 ISP.4
NetC2_2: C2.2 U3.4 | length 103.7
  Top Layer w18: U3.4 6169.41,5885.43 C2.2
NetC12_1: C12.1 IMU1.24 | length 251
  Top Layer w8: IMU1.24 5050,5095.79 C12.1
NetC13_1: C13.1 IMU1.21 | length 434.8
  Top Layer w8: IMU1.21 5100,5155 5210,5265 5320,5265 5370,5315 C13.1
NetC21_2: C21.2 FTDI.1 | length 1265.3
  Top Layer w8: FTDI.1 4150,5910 4210,5970 4710,5970 4730,5950 4730,5770 4575,5615 4450,5615 4394.57,5559.57 C21.2
NetC22_2: C22.2 U1.2 | length 132.6
  Top Layer w10: 3465,4920 U1.2
  Top Layer w20: 3465,4920 3490,4895 3490,4861.5 C22.2
NetC23_1: C23.1 E1.1 U1.1 | length 216.1
  Top Layer w20: E1.1 3408.98,5000 U1.1 3425,4955.16 C23.1
NetC24_1: C24.1 U2.22 | length 669.8
  Top Layer w8: C24.1 3860.79,4235.36 U2.22
NetC25_1: C25.1 U2.21 | length 486.6
  Top Layer w8: C25.1 3805.43,4460.43 3841.1,4496.1 U2.21
NetC26_1: C26.1 U2.60 | length 161.7
  Top Layer w8: C26.1 3780,5295 3841.1,5233.9 U2.60
NetD1_1: D1.1 P1.2 Q1.3 | length 373.9
  Top Layer w18: P1.2 Q1.3 4402.6,6343.1 D1.1
NetD2_1: D2.1 P2.2 Q2.3 | length 233.8
  Top Layer w18: Q2.3 5442.9,3534.5 D2.1 5655.5,3534.5 P2.2
NetD3_1: D3.1 P3.2 Q3.3 | length 378.4
  Top Layer w18: D3.1 5490.5,6588.1 Q3.3 P3.2
NetD4_1: D4.1 P4.2 Q4.3 | length 306.4
  Top Layer w18: P4.2 4460.5,3415 D4.1 4565,3519.5 Q4.3
NetDS1_2: DS1.2 R_LED1.1 | length 121.1
  Top Layer w18: DS1.2 R_LED1.1
NetDS2_2: DS2.2 R_LED2.1 | length 121.1
  Top Layer w18: DS2.2 R_LED2.1
NetDS3_2: DS3.2 R_LED3.1 | length 107.3
  Top Layer w18: DS3.2 R_LED3.1
NetIMU1_5: IMU1.5 R10.1 | length 342.2
  Top Layer w8: R10.1 5000,4864.85 5014,4878.85 5014,4911.15 5000,4925.15 5000,5005 5016.38,5021.38 IMU1.5
NetIMU1_6: IMU1.6 R11.1 | length 293.6
  Top Layer w8: IMU1.6 5032.28,4751.18 R11.1
NetIMU1_7: IMU1.7 R12.1 | length 313.5
  Top Layer w8: IMU1.7 5049.21,4799.25 R12.1
NetIMU1_8: IMU1.8 R13.1 | length 334
  Top Layer w8: IMU1.8 5066.14,4853.86 R13.1
NetQ1_1: Q1.1 R9.2 | length 220.6
  Top Layer w18: Q1.1 4505,6515 R9.2
NetQ2_1: Q2.1 R6.2 | length 139.5
  Top Layer w18: R6.2 5354.13,3572.4 Q2.1
NetQ3_1: Q3.1 R7.2 | length 141.8
  Top Layer w18: R7.2 5417.6,6708.94 Q3.1
NetQ4_1: Q4.1 R8.2 | length 122.4
  Top Layer w18: Q4.1 4638.07,3673.07 R8.2
PGND: C4.1 C5.1 C6.1 C7.1 C8.1 C9.1 C10.1 C11.1 C17.2 C18.2 DEBUG.9 Q1.2 Q2.2 Q3.2 Q4.2 R17.2 | length 9619.9
  Top Layer w18: v1(4155,6680) 4100,6680 4050,6630 C11.1 4138.5,6576.5 C10.1 4140,6600 4225,6685 4409.8,6685 Q1.2 4881.22,6617.4 C17.2 5324.29,6645.91 Q3.2 5417.6,6404.09 C9.1 5298.94,6381.5 C8.1 5254.57,6385.43 v1(5165,6475) ; C6.1 4398.94,3634.57 C7.1 4403.9,3637.4 Q4.2 4527.6,3772.6 4615,3860 4685.63,3860 C18.2 ; v1(5010,3610) 4953.82,3610 C18.2 ; C5.1 5194.13,3344.37 C4.1 5194.13,3494.13 5197.6,3497.6 ; Q2.2 5197.6,3497.6 ; DEBUG.9 6100,5035 v1(6170,5035) ; C18.2 5048.03,3497.6 5197.6,3497.6
  Bottom Layer w18: R17.2 3865,6390 v1(4155,6680) ; v1(5010,3610) 5170,3770 5170,3965 5206,4001 6251,4001 6460,4210 6460,4745 v1(6170,5035) 6084.53,5120.47 6051.56,5120.47 5547.03,5625 5165,5625 4766.31,6023.69 4766.31,6121.46 4766,6121.77 4766,6158.23 4791.77,6184 4859,6184 5150,6475 v1(5165,6475)
RESET: C21.1 ISP.5 R14.1 SW1.1 U2.12 | length 3207.8
  Top Layer w10: SW1.1 3558.46,4408.31 3558.46,4540 3575,4556.54 3575,4840 3671.1,4936.1 U2.12 ; R14.1 3655,4453.46 v1(3655,4370) ; v1(3980,4455) 4070,4545 v1(4305,4545) ; v1(4305,4670) 4385,4750 4470,4750 4775,5055 4775,5335 4580.43,5529.57 4465,5529.57 ISP.5
  Bottom Layer w10: v1(3655,4370) 3895,4370 v1(3980,4455) ; v1(4305,4545) v1(4305,4670)
RF_N: U1.3 U2.9 | length 265.7
  Top Layer w7.38: 3713.09,4995.16 U2.9
  Top Layer w8: U1.3 3490.59,4993.25 3492.5,4995.16 3713.09,4995.16
RF_P: U1.4 U2.8 | length 265.7
  Top Layer w8: U1.4 3490.59,5016.75 3492.5,5014.84 U2.8
RX0: FTDI.3 U2.46 | length 932.9
  Top Layer w8: U2.46 4158.27,5113.27 4208,5163 4208,5516.1 4200,5524.1 4200,5740 FTDI.3
SCK: ISP.3 U2.37 | length 959.1
  Top Layer w8: U2.37 4143.9,4936.1 4225,4855 4475,4855 4615,4995 4615,5265 ISP.3
SCL: DEBUG.7 IMU1.2 U2.25 | length 3137.5
  Top Layer w8: U2.25 3919.84,4700.16 4024,4596 4396,4596 4755,4955 v1(4910,4955) ; v1(4935,5120) 4982.83,5072.17 IMU1.2 ; v1(5885,5050) 5825,4990 5825,4895 5880,4840 6045,4840 DEBUG.7
  Bottom Layer w8: v1(4910,4955) 4935,4980 v1(4935,5120) 5055,5240 5670,5240 5860,5050 v1(5885,5050)
SDA: DEBUG.8 IMU1.4 U2.26 | length 2698.4
  Top Layer w8: U2.26 3939.53,4705.47 4035,4610 4385,4610 4813.31,5038.31 4975,5038.31 ; v1(4975,4895) 4975,5038.31 ; IMU1.4 4975,5038.31 ; v1(5900,4895) 5970,4965 DEBUG.8
  Bottom Layer w8: v1(4975,4895) v1(5900,4895)
TX0: FTDI.2 U2.47 | length 870.7
  Top Layer w8: U2.47 4147.95,5132.95 4194,5179 4194,5510.3 4180,5524.3 4180,5820 FTDI.2
V_BAT: C1.2 C4.2 C5.2 C6.2 C7.2 C8.2 C9.2 C10.2 C11.2 C17.1 C18.1 D1.2 D2.2 D3.2 D4.2 DEBUG.1 P1.1 P2.1 P3.1 P4.1 P5.1 U3.1 U3.3 | length 10301
  Top Layer w18: C11.2 4130.63,6513.5 C10.2 4245.87,6504.13 P1.1 ; D1.2 4270.5,6479.5 P1.1 ; C7.2 4391.06,3705.43 C6.2 4313.47,3705.43 4220,3611.96 4220,3385 4290,3315 P4.1 4359.5,3300.5 D4.2 4896.29,3300.5 C18.1 5056.06,3348.94 5145,3260 5240,3260 5261.5,3281.5 C5.2 ; C4.2 5261.5,3441.5 C5.2 ; P3.1 5619.5,6489.5 D3.2 ; U3.3 6007.4,5887.6 C1.2@5945.63,5949.37 ; U3.1 6012.4,5962.4 5999.37,5949.37 C1.2@5945.63,5949.37 ; P1.1 4185,6395 v1(4160,6395) 4160,6300 4275,6185 4610,6185 4710,6285 4710,6325 4778.94,6393.94 C17.1 5096.06,6393.94 5175.43,6314.57 C8.2 5391.06,6314.57 C9.2 5493.5,6220 5575,6220 5619.5,6264.5 D3.2 ; C5.2 5474.5,3340 D2.2 5554.5,3420 P2.1 5730,3420 5760,3450 5760,3600 5670,3690 P5.1 5920,4090 6070,4240 DEBUG.1 6695,4265 6915,4485 6915,5255 6585,5585 6585,5990 6395,6180 5779.5,6180 ; D3.2 5779.5,6180 ; 5779.5,6180 5925,6034.5 C1.2 C1.2@5945.63,5949.37
VCC: C3.2 C14.1 C15.2 C16.1 C19.2 C20.1 DEBUG.2 IMU1.1 IMU1.3 IMU1.22 IMU1.23 R10.2 R11.2 R12.2 R13.2 R14.2 U2.23 U2.34 U2.44 U2.54 U2.59 U3.5 | length 6550.4
  Top Layer w8: R14.2 3501.54,4383.46 v2(3645,4240) 3701.93,4183.07 3701.93,4147.31 3707.79,4141.46 3832.21,4141.46 3885.24,4194.48 3885.24,4842.87 3914.65,4872.28 4070.46,4872.28 ; v1(3935,5645) 3930,5640 3930,5415 3975,5370 3975,5310 3959.21,5294.21 U2.54 ; v1(4375,5625) 4445,5695 v1(4570,5695) ; v1(4950,5335) 4995,5290 4995,5132.28 IMU1.1 ; IMU1.3 4959.76,5055.24 4945,5070 4811.21,5070 4372.21,4631 4278.85,4631 4151,4758.85 4151,4836.66 4105.85,4881.81 4072.13,4881.81 4063.39,4890.55 ; IMU1.23 5066.14,5128.07 5083.07,5145 ; IMU1.22 5083.07,5145 ; v1(5180,5295) 5180,5328.5 C14.1@5201.06,5349.57 ; C16.1 5228.62,5329.88 C14.1 C14.1@5201.06,5349.57 ; v1(5815,5970) v1@5820,5965 ; 4063.39,4890.55 4063.39,4879.35 4070.46,4872.28 ; 4063.39,4890.55 4063.39,5060.39 ; 4063.39,5060.39 4063.39,5069.13 4072.13,5069.13 ; 4063.39,5060.39 4072.13,5069.13 ; 4070.46,4872.28 4104.17,4872.28 ; 4072.13,5069.13 4104.17,5069.13 ; 4104.17,4872.28 4107.8,4872.28 4107.8,4868.66 4104.17,4872.28 ; 4104.17,5069.13 4108.33,5069.13 4108.33,5064.98 4104.17,5069.13 ; 5083.07,5145 5083.07,5238.07 5130,5285 C15.2 C14.1@5201.06,5349.57
  Bottom Layer w8: C19.2 3655.43,5585 C20.1 3650.43,5645.43 v1(3705,5700) ; v1(3935,5645) 4355,5645 v1(4375,5625) ; v1(4570,5695) 4660,5605 v1(4660,5580) ; v1(4950,5335) 5140,5335 v1(5180,5295) ; v1(5150,5810) 5310,5970 v1(5815,5970)
XTAL1: C_OSC2.2 U2.57 XTAL1.1 | length 460.5
  Top Layer w8: XTAL1.1 3759,5486 3792.5,5452.5 3852.5,5452.5 3852.5,5374 C_OSC2.2 3881.5,5233.5 3900.16,5214.84 U2.57
XTAL2: C_OSC1.2 U2.56 XTAL1.3 | length 439.5
  Top Layer w8: XTAL1.3 3900.5,5534.5 3900.5,5472.12 3881.5,5453.12 C_OSC1.2 3919.84,5376.65 U2.56
pads on no net: C?.1 C?.2 E1.2 FTDI.4 FTDI.5 IMU1.9 IMU1.10 IMU1.11 IMU1.12 IMU1.13 SW1.2 SW1.4 U1.6 U2.1 U2.2 U2.3 U2.4 U2.5 U2.6 U2.13 U2.14 U2.15 U2.16 U2.17 U2.18 U2.19 U2.27 U2.28 U2.29 U2.30 U2.31 U2.32 U2.36 U2.40 U2.42 U2.43 U2.62 U2.63 U2.64

## Polygon pours and split planes (outlines as drawn)
GND on Bottom Layer "Bottom Layer-No Net" (solid, pour order 16): 3332.55,4033.51 3332.55,6058.51 6440,6058.51 6440,4033.51
PGND on Bottom Layer "Bottom Layer-No Net" (solid, pour order 4): 4121.99,6175.36 4121.99,6765.36 5696.99,6765.36 5696.99,6175.36
PGND on Bottom Layer "Bottom Layer-No Net" (solid, pour order 10): 4182.92,3261.63 4182.92,3851.63 5757.92,3851.63 5757.92,3261.63
VCC on Top Layer "Bottom Layer-No Net" (solid, remove dead copper, pour order 14): 3619.33,4027 3619.33,6057.47 6445,6057.47 6445,4027
V_BAT on Top Layer "Bottom Layer-No Net" (solid, pour order 8): 3923.62,6174.93 4046.19,6764.93 5698.71,6764.93 5698.71,6174.93
V_BAT on Top Layer "Bottom Layer-No Net" (solid, pour order 12): 4189.29,3263.35 4189.29,3853.35 5764.29,3853.35 5764.29,3263.35

## Silkscreen, mask and mechanical layers (free items; w line width, h text height)
Mechanical 1:
  drawing of 792 lines, arcs and shapes, not listed

## Text inside footprints (layer, text, board x,y; h text height)
ISP: Top Overlay "6" at 4415,5245 h30 r180; Top Overlay "5" at 4415,5345 h30 r180; Top Overlay "2" at 4775,5245 h30 r180; Top Overlay "1" at 4755,5345 h30 r180